# Altium PCB PCB1test route.PcbDoc
Units mm, origin at the board's own origin, x right, y up, seen from the top; angles counter-clockwise.
Board outline 70.36 x 70.1 mm, 2 copper layers (Top Layer, Bottom Layer); 21 components, 18 nets, 83 pads, 0 vias.
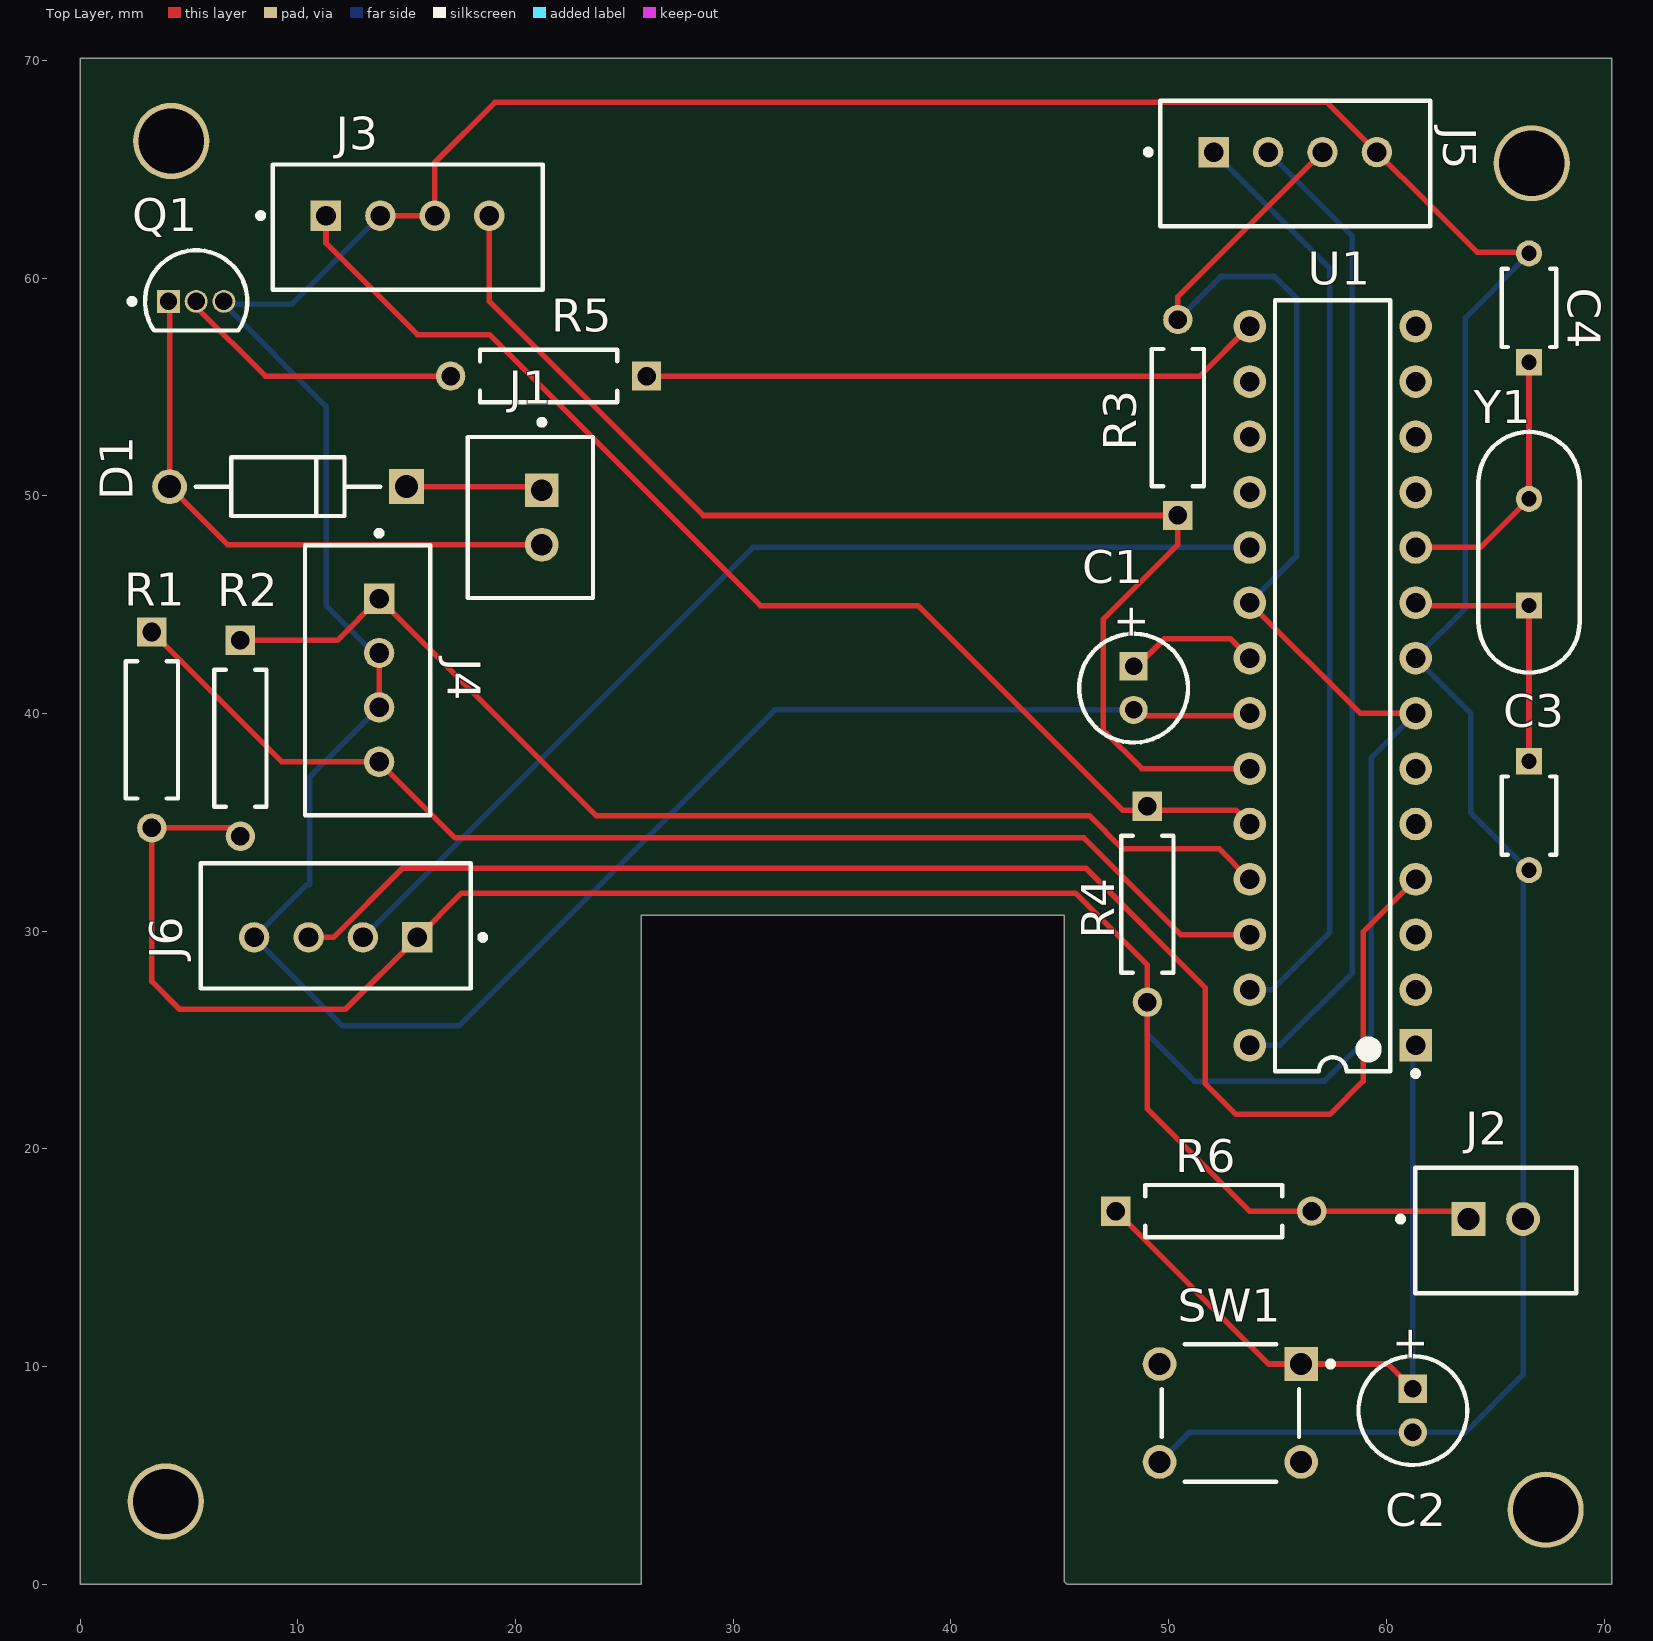
[diagram p0: Top Layer view]
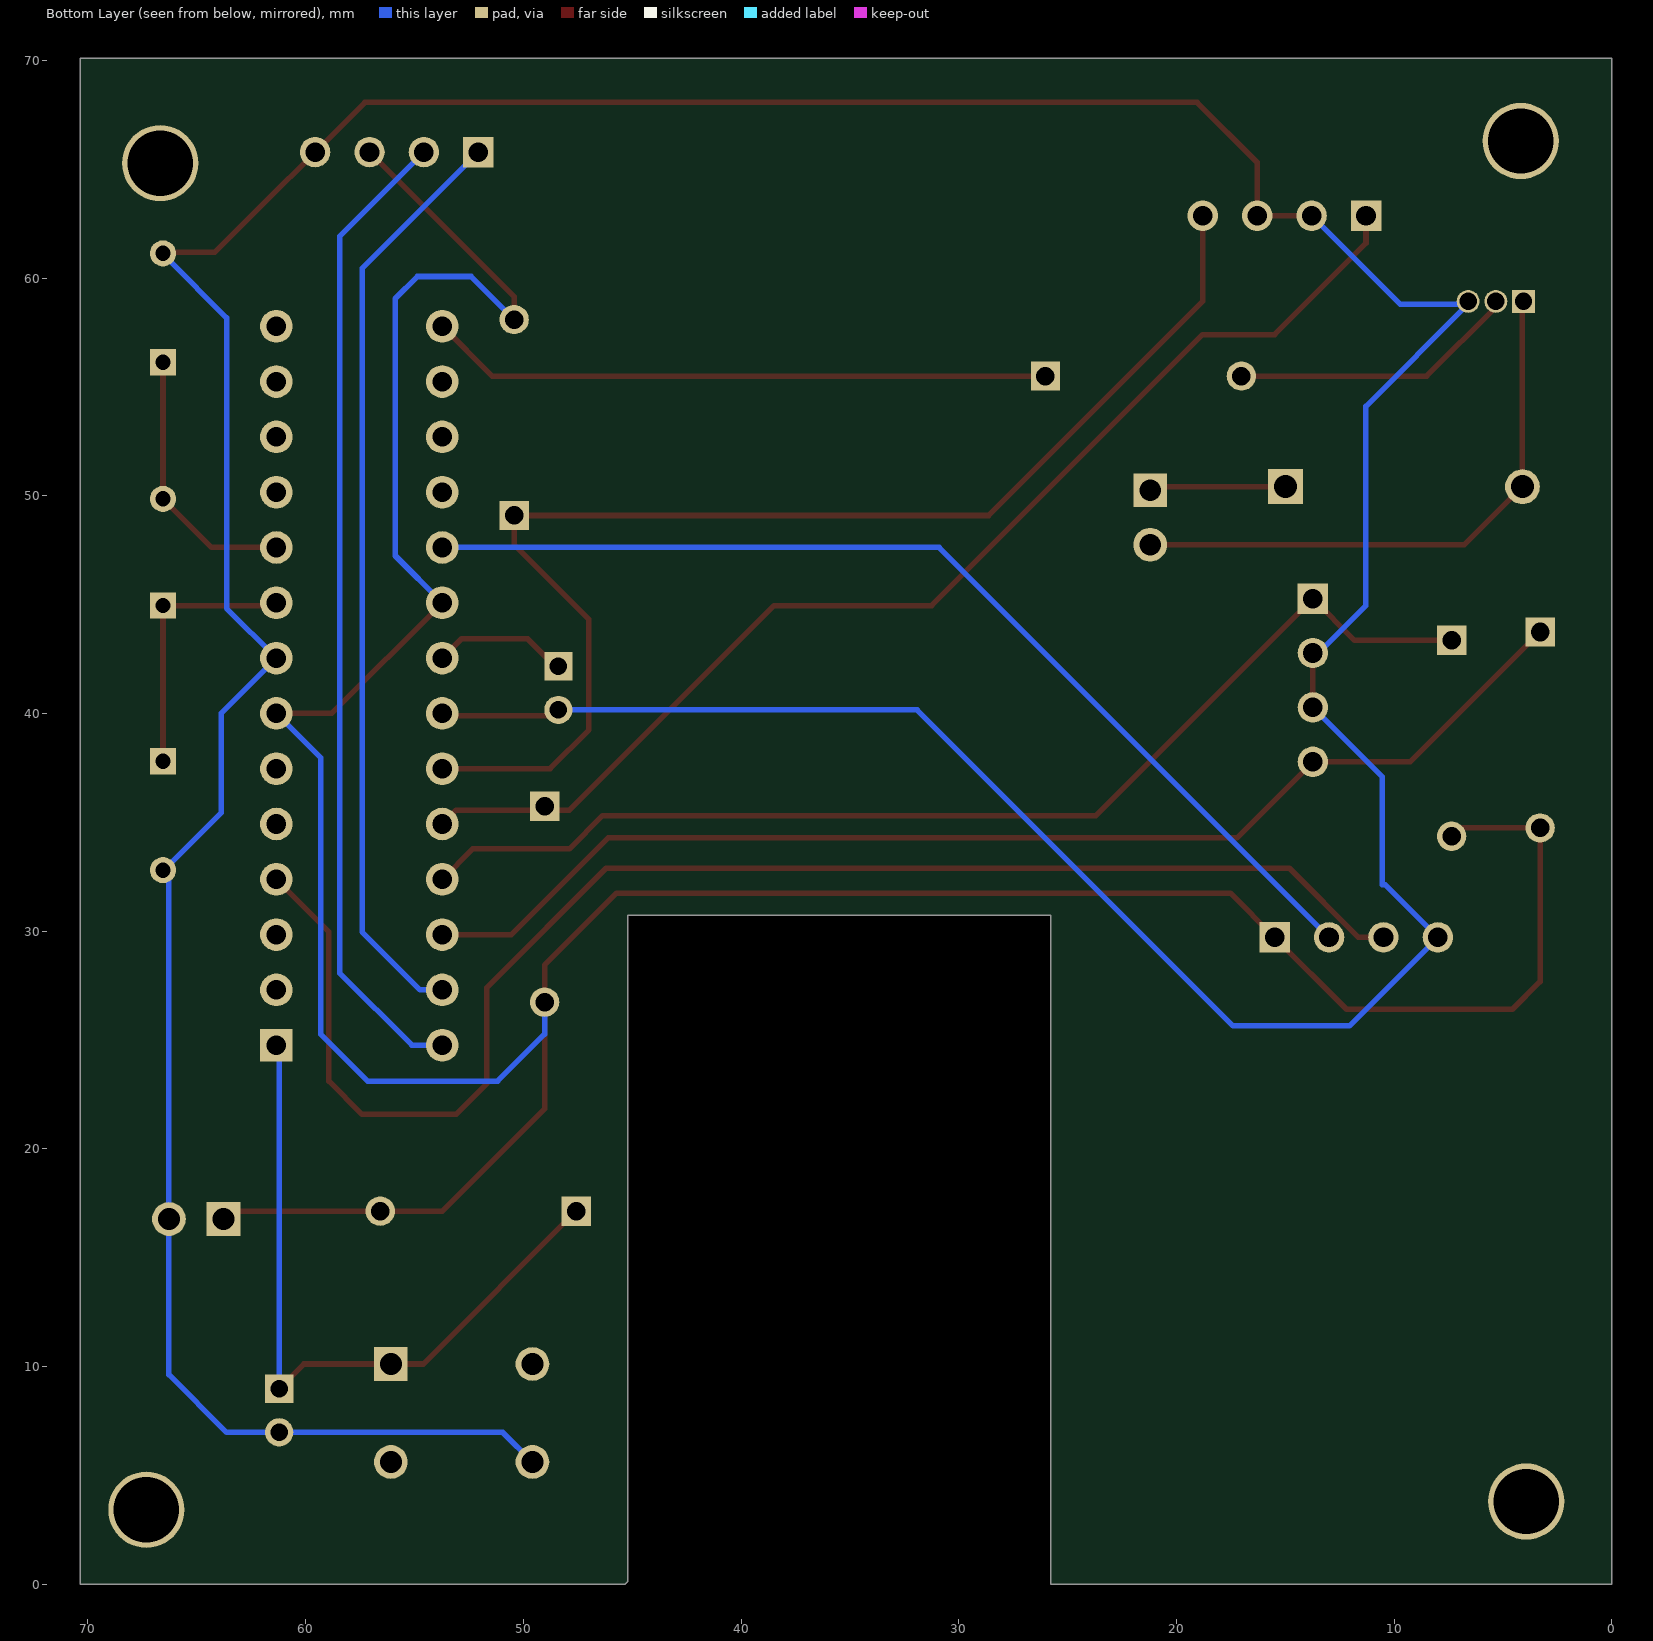
[diagram p1: Bottom Layer view, seen from below]

## Layer stack, top to bottom
Top Solder: solder mask 0.0102, Solder Resist, Dk 3.5
Top Layer: signal copper 0.0356
Dielectric 1: dielectric 0.32, FR-4, Dk 4.8
Bottom Layer: signal copper 0.0356
Bottom Solder: solder mask 0.0102, Solder Resist, Dk 3.5

## Board outline
0,0 0,70.104 70.358,70.104 70.358,0 45.339,0 45.212,0.127 45.212,30.734 25.781,30.734 25.781,0

## Design rules (kind name [scope] priority, off if disabled: settings)
BoardOutlineClearance [All] p1: gap=0.2 ignorepadtopadclearanceinfootprint=FALSE
Clearance [All] p1: gap=0.127 ignorepadtopadclearanceinfootprint=FALSE except(0.25: Arc-Hole Track-Hole SMDPad-Hole THPad-Hole Via-Hole Fill-Hole Poly-Hole Region-Hole Text-Hole)
ComponentClearance [All] p1: gap=0.127 collisioncheckmode=3 verticalgap=0.127 showdistances=TRUE
DiffPairsRouting [All] p1: maxlimit=0.254 minlimit=0.127 mostfreqgap=0.127 toplayer_minwidth=0.127 toplayer_maxwidth=25.4 toplayer_prefwidth=0.127 bottomlayer_minwidth=0.127 bottomlayer_maxwidth=25.4 bottomlayer_prefwidth=0.127 maxuncoupledlength=12.7
Height [All] p1: minheight=0 maxheight=1816.048 prefheight=12.7
HoleSize [All] p1: absolutevalues=TRUE maxlimit=6.3 minlimit=0.3 maxpercent=80.000 minpercent=20.000
HoleToHoleClearance [All] p1: gap=0.25 allowstackedmicrovias=FALSE
MinimumAnnularRing [All] p1: minimumring=0.076
MinimumSolderMaskSliver [All] p1: minsoldermaskwidth=0
PlaneClearance [All] p1: clearance=0.127
PlaneConnect PlaneConnectPowerPads [InPadClass('PowerPads')] p1: planeconnectstyle=Direct reliefexpansion=0.508 reliefentries=4 reliefconductorwidth=0.254 reliefairgap=0.254
PlaneConnect [All] p2: pad.planeconnectstyle=Relief pad.reliefexpansion=0.3 pad.reliefentries=4 pad.reliefconductorwidth=0.127 pad.reliefairgap=0.127 via.planeconnectstyle=Direct via.reliefexpansion=0.3 via.reliefentries=4 via.reliefconductorwidth=0.127 via.reliefairgap=0.127
PolygonConnect PolygonConnectPowerPads [All vs (InPadClass('PowerPads'))] p1: connectstyle=Direct reliefconductorwidth=0.254 reliefentries=4 polygonreliefangle="90 Angle" airgapwidth=0.254
PolygonConnect [All] p2: thpad.connectstyle=Relief thpad.reliefconductorwidth=0.127 thpad.reliefentries=4 thpad.polygonreliefangle="90 Angle" thpad.airgapwidth=0.127 smdpad.connectstyle=Relief smdpad.reliefconductorwidth=0.127 smdpad.reliefentries=4 smdpad.polygonreliefangle="90 Angle" smdpad.airgapwidth=0.127 via.connectstyle=Direct via.reliefconductorwidth=0.127 via.reliefentries=4 via.polygonreliefangle="90 Angle" via.airgapwidth=0.127
RoutingVias [All] p1: holewidth=0.3 width=0.6 viastyle="Through Hole" minholewidth=0.3 minwidth=0.6 maxholewidth=0.6 maxwidth=6.6
SilkToSilkClearance [All] p1: silktosilkclearance=0
SilkToSolderMaskClearance [IsPad] p1: minsilkscreentomaskgap=0.127 clearancetoexposedcopper=TRUE
SolderMaskExpansion [All] p1: expansion=0.075 istentingtop=FALSE
Width [All] p1: maxlimit=25.4 minlimit=0.254 preferedwidth=0.254 minimp=50.000000 maximp=50.000000 favimp=50.000000
20 further rules are at their usual default settings.

## Classes and differential pairs
component class Sheet1: C1 C2 C3 C4 D1 J1 J2 J3 J5 J6 R1 R2 R3 R4 R5 R6 SW1 U1 Y1

## Components (designator, comment, footprint, x,y, rotation, side; value= is the part's Value field where it differs from the comment)
C1 "ECA-1HHG010" CAPPR55-200-1100X500X1200 48.387,41.164 r270 top value=0.1µF
C2 "ECA-1HHG010" CAPPR55-200-1100X500X1200 61.214,7.985 r270 top value=0.1µF
C3 "RCE5C1H220J0M1H03A" FP-RCE0K1-MFG 66.548,35.306 r270 top
C4 "RCE5C1H220J0M1H03A" FP-RCE0K1-MFG 66.548,58.634 r90 top
D1 "1N4001-E3/54" FP-1N4001-E3-54-MFG 9.548,50.419 r180 top
J1 "" FP-B2B-XH-A_LF_SN-MFG 20.684,49.002 r270 top
J2 "" FP-B2B-XH-A_LF_SN-MFG 65.024,16.256 r0 top
J3 "B4B-XH-A(LF)(SN)" FP-B4B-XH-A_LF_SN-MFG 15.046,62.34 r180 top
J4 "B4B-XH-A(LF)(SN)" FP-B4B-XH-A_LF_SN-MFG 13.208,41.529 r90 top
J5 "B4B-XH-A(LF)(SN)" FP-B4B-XH-A_LF_SN-MFG 55.813,65.261 r180 top
J6 "B4B-XH-A(LF)(SN)" FP-B4B-XH-A_LF_SN-MFG 11.744,30.243 r0 top
Q1 "BC547B" ONSC-TO-92-3-29-11 5.334,58.928 r0 top
R1 "MFR-25FBF52-22R1" RESA60-630X240 3.302,39.243 r270 top value=4.7K
R2 "MFR-25FBF52-22R1" RESA60-630X240 7.366,38.862 r270 top value=4.7K
R3 "MFR-25FBF52-22R1" RESA60-630X240 50.419,53.594 r90 top value=4.7K
R4 "MFR-25FBF52-22R1" RESA60-630X240 49.022,31.242 r270 top value=4.7K
R5 "MFR-25FBF52-221R" RESA60-630X240 21.518,55.499 r180 top value=221
R6 "MFR-25FBF52-22R1" RESA60-630X240 52.07,17.145 r0 top value=10K
SW1 "EVQ-PAG07K" FP-EVQ-PAG07K-MFG 52.832,7.874 r270 top
U1 "ATmega328-PU" 28P3 57.531,41.275 r180 top
Y1 "HC-49US 16.000MHZ" JPY-HC-49US 66.548,47.408 r90 top

## Footprints (in the part's own frame and the unit in brackets; to place one, negate y for a bottom-side part, rotate by r counter-clockwise, add the part's x,y. Pads: shape width x height; smd on the part's side, far side on the other; paste and mask are expansions set on the pad)
28P3 [mm] "28-Pin Plastic Dual In-Line Package (PDIP)"
  rect 1.5x1.5 hole 0.9: 1(-3.81,16.51)
  round 1.5 hole 0.9: 2(-3.81,13.97) 3(-3.81,11.43) 4(-3.81,8.89) 5(-3.81,6.35) 6(-3.81,3.81) 7(-3.81,1.27) 8(-3.81,-1.27) 9(-3.81,-3.81) 10(-3.81,-6.35) 11(-3.81,-8.89) 12(-3.81,-11.43) 13(-3.81,-13.97) 14(-3.81,-16.51) 15(3.81,-16.51) 16(3.81,-13.97) 17(3.81,-11.43) 18(3.81,-8.89) 19(3.81,-6.35) 20(3.81,-3.81) 21(3.81,-1.27) 22(3.81,1.27) 23(3.81,3.81) 24(3.81,6.35) 25(3.81,8.89) 26(3.81,11.43) 27(3.81,13.97) 28(3.81,16.51)
  silkscreen extent -3.94,-17.7 2.65,17.93, body extent -3.6,-17.65 3.6,17.65, height 4.58
CAPPR55-200-1100X500X1200 [mm] "THD, 2-Leads, Dia 5mm, Pin Spacing 2mm"
  rect 1.3x1.3 hole 0.8: 1(-1,0)
  round 1.3 hole 0.8: 2(1,0)
  silkscreen extent -2.5,-2.5 2.5,2.5, body extent -2.5,-2.5 2.45,2.5, height 12
FP-1N4001-E3-54-MFG [mm]
  rect 1.6x1.6 hole 1.05 paste-1000 mask+0: 1(-5.438,0)
  round 1.6 hole 1.05 paste-1000 mask+0: 2(5.438,0)
  silkscreen extent -4.24,-1.35 4.24,1.35, body extent -6.34,-1.45 6.34,1.45, height 0.25
FP-B2B-XH-A_LF_SN-MFG [mm]
  rect 1.55x1.55 hole 1 paste-1000 mask+0: 1(-1.25,0.525)
  round 1.55 hole 1 paste-1000 mask+0: 2(1.25,0.525)
  silkscreen extent -4.5,-2.87 3.7,2.88, body extent -3.8,-2.98 3.8,2.98, height 0.25
FP-B4B-XH-A_LF_SN-MFG [mm]
  rect 1.4x1.4 hole 0.9 paste-1000 mask+0: 1(3.75,-0.525)
  round 1.4 hole 0.9 paste-1000 mask+0: 2(1.25,-0.525) 3(-1.25,-0.525) 4(-3.75,-0.525)
  silkscreen extent -6.2,-2.88 6.87,2.87, body extent -6.3,-2.98 6.3,2.98, height 0.25
FP-EVQ-PAG07K-MFG [mm]
  rect 1.55x1.55 hole 1 paste-1000 mask+0: A(-2.25,3.25)
  round 1.55 hole 1 paste-1000 mask+0: A'(-2.25,-3.25) B(2.25,3.25) B'(2.25,-3.25)
  silkscreen extent -3.15,-3.15 3.15,4.73, body extent -3.25,-4.13 3.25,4.13, height 0.25
FP-RCE0K1-MFG [mm]
  rect 1.2x1.2 hole 0.7 paste-1000 mask+0: 1(-2.5,0)
  round 1.2 hole 0.7 paste-1000 mask+0: 2(2.5,0)
  silkscreen extent -1.8,-1.25 1.8,1.25, body extent -3.2,-1.35 3.2,1.35, height 0.25
JPY-HC-49US [mm] "THD, 2-Leads, Body 11.05x4.65mm, Pitch 4.9mm"
  rect 1.2x1.2 hole 0.7: 1(-2.45,0)
  round 1.2 hole 0.7: 2(2.45,0)
  silkscreen extent -5.53,-2.33 5.53,2.33, body extent -5.53,-2.33 5.52,2.32, height 3.5
ONSC-TO-92-3-29-11 [mm] "TO, 3-Leads, Body Dia 4.7mm, Pitch 1.27mm"
  rect 1.05x1.05 hole 0.8: 1(-1.27,0)
  round 1.05 hole 0.8: 2(0,0) 3(1.27,0)
  silkscreen extent -3.07,-1.34 2.35,2.35, body extent -2.35,-1.33 2.36,2.36, height 7.87
RESA60-630X240 [mm] "Axial Resistor, 2-Leads, Dia 2.4mm, Body Length 6.3mm"
  rect 1.35x1.35 hole 0.85: 1(-4.5,0)
  round 1.35 hole 0.85: 2(4.5,0)
  silkscreen extent -3.15,-1.2 3.15,1.2, body extent -4.77,-1.19 4.77,1.2, height 2.4

## Part data
C1 C2: library part CMP-001-00024-7, "Aluminum Electrolytic Capacitor, 1 uF, +/- 20%, 50 V, -55 to 105 degC, 2-Pin THD, RoHS, Bulk", Capacitor Type=Electrolytic, Case/Package=Radial, Manufacturer=Panasonic, Max Operating Temperature=105°C, Min Operating Temperature=-55°C, Package Description="2-Pin Radial Lead, Dia 5 mm, Height 12 mm", Package Quantity=200, Package Reference=CAPPR55-200-1100X500X1200, Ripple Current=10mA, Tolerance=20%, Voltage Rating=50V, Datasheet URL=https://datasheet.ciiva.com/7275/94060-7275472.pdf, Datasheet Version=Mar-05, Diameter=5mm, Lead Pitch=2mm, Manufacturer URL=http://www.panasonic.com/, Mounting Technology=TH, Packaging=Bulk, Pins=2, Ripple Current (AC)=10mA, RoHS Compliant=True
C3 C4: library part CMP-06035-004895-1, "Cap Ceramic 22pF 50V C0G ±5% Radial 5mm +125°C Automotive Bulk", Capacitance=22pF, Case/Package=Radial, Dielectric=C0G, Max Operating Temperature=125°C, Min Operating Temperature=-55°C, Package Quantity=2000, Ratings=AEC-Q200, Resistor Type=Ceramic, Tolerance=5%, Voltage Rating=50V, Height=3.5mm, Height - Seated (Max)=0.138inch, Lead Diameter=0.5mm, Lead Pitch=0.197inch, Lead/Base Style="Formed Leads", Length=0.142inch, Mount="Through Hole", Packaging="Tape and Reel", Termination=Radial, Voltage Rating (DC)=50V, Width=0.098inch
D1: library part CMP-02540-000077-1, "DIODE GEN PURP 50V 1A DO204AL", Average Rectified Current=1A, Capacitance=15pF, Case/Package=DO-204AL, Forward Voltage=1.1V, Max Forward Surge Current (Ifsm)=30A, Max Operating Temperature=150°C, Max Repetitive Reverse Voltage (Vrrm)=50V, Max Reverse Current=5uA, Min Operating Temperature=-50°C, Package Quantity=5500, Peak Non-Repetitive Surge Current=45A, Current=1A, Current Rating=1A, Diameter=2.7mm, Element Configuration=Single, Forward Current=1A, Height=2.7mm, Lead Free="Lead Free", Length=0.204inch, Max Reverse Voltage (DC)=50V, Max Surge Current=30A, Mount="Through Hole", Number of Pins=2, Output Current=1A, Packaging="Tape and Reel", Polarity=Standard, Radiation Hardening=No, Reverse Voltage=50V, RoHS Compliant=Yes, Series=-, Voltage=50V, Voltage Rating (DC)=50V, Width=2.7mm
J1 J2: library part CMP-2000-05888-3, "CONN HEADER VERT 2POS 2.5MM", Color=Natural, Contact Resistance=20mR, Current Rating=3A, Housing Color=White, Insulation Resistance=1GR, Max Operating Temperature=85°C, Max Voltage Rating (AC)=250V, Min Operating Temperature=-25°C, Connector Type="Male Pin", Contact Material=Brass, Contact Plating=Tin, Contact Type="Male Pin", Depth=5.75mm, Fastening Type=Detent, Housing Material=Polyamide, Lead Free="Lead Free", Lead Pitch=2.5mm, Length=7.4mm, Max Current Rating=3A, Max Voltage Rating (DC)=250V, Mount="Through Hole", Number of Contacts=2, Number of Positions=2, Number of Rows=1, Orientation=Straight, Packaging=Bulk, Pitch=2.5mm, REACH SVHC="No SVHC", Series=XH, Termination=Solder, Voltage Rating=250V, Voltage Rating (AC)=250V, Wire/Cable Gauge=22AWG
J3 J4 J5 J6: library part CMP-17439-000250-1, "CONN HEADER VERT 4POS 2.5MM", Color=Natural, Contact Resistance=20mR, Current Rating=3A, Flammability Rating="UL94 V-0", Housing Color=White, Insulation Resistance=1GR, Max Operating Temperature=85°C, Max Voltage Rating (AC)=250V, Min Operating Temperature=-25°C, Package Quantity=500, Connector Type=Header, Contact Finish - Mating=TIN, Contact Material=Brass, Contact Plating=Tin, Contact Shape=Square, Contact Type="Male Pin", Depth=5.75mm, Fastening Type=Detent, Gender=Male, Housing Material=Polyamide, Insulation Color=Natural, Insulation Material=Nylon, Lead Free="Lead Free", Lead Pitch=2.5mm, Length=12.4mm, Mated Stacking Heights=9.8mm, Material=Polyamide, Max Current Rating=3A, Max Voltage Rating (DC)=250V, Mount="Through Hole", Number of Contacts=4, Number of Positions=4, Number of Rows=1, Orientation=Straight, Packaging=Bulk, Pitch=2.5mm, REACH SVHC="No SVHC", Series=XH, Termination=Solder, Voltage Rating=250V, Voltage Rating (AC)=250V, Wire/Cable Gauge=22AWG
Q1: library part CMP-1048-01467-1, "Amplifier Transistor, NPN Silicon, 3-Pin TO-92, Bulk Box", Manufacturer="On Semiconductor", ComponentLink1Description="Manufacturer URL", ComponentLink1URL=http://www.onsemi.com/, ComponentLink2Description=Datasheet, ComponentLink2URL=http://www.onsemi.com/pub_link/Collateral/BC546-D.PDF, ComponentLink3Description="Package Specification", ComponentLink3URL=http://www.onsemi.cn/pub_link/Collateral/2N6426-D.PDF, DatasheetVersion="Rev. 7", fT Min (MHz)=150, IC Continuous (A)=0.1, Mounting Technology="Through Hole", PackageDescription="3-Pin Transistor Outline, Body 4.825 x 3.685 mm, Pitch 1.27 mm", PackageReference=TO-92-3-29-11_AM_SL, PackageVersion="Rev. AM", Packing="Bulk Box", PartNumber=BC547B, Polarity=NPN, RoHS=FALSE
R1 R2 R3 R4 R6: library part CMP-009-00053-4, "Axial Resistor, 22.1 Ohm, +/- 1%, 250 mW, -55 to 155 degC, 2-Pin THD, RoHS, Bulk", Case/Package=Axial, Manufacturer=Yageo, Max Operating Temperature=155°C, Min Operating Temperature=-55°C, Package Description="2-Pin Axial Lead, Dia 2.4 mm, Body Length 6.3 mm", Package Quantity=200, Package Reference=MFR-25, Power=250mW, Tolerance=1%, Voltage Rating=250V, Datasheet URL=http://www.yageo.com/documents/recent/Yageo%20LR_MFR_2013.pdf, Datasheet Version=Apr-13, Manufacturer URL=http://www.yageo.com/, Mounting Technology=TH, Packaging=Bulk, RoHS Compliant=True
R5: library part CMP-009-00051-4, "Axial Resistor, 221 Ohm, +/- 1%, 250 mW, -55 to 155 degC, 2-Pin THD, RoHS, Bulk", Case/Package=Axial, Manufacturer=Yageo, Max Operating Temperature=155°C, Min Operating Temperature=-55°C, Package Description="2-Pin Axial Lead, Dia 2.4 mm, Body Length 6.3 mm", Package Quantity=200, Package Reference=MFR-25, Power=250mW, Tolerance=1%, Voltage Rating=250V, Datasheet URL=http://www.yageo.com/documents/recent/Yageo%20LR_MFR_2013.pdf, Datasheet Version=Apr-13, Manufacturer URL=http://www.yageo.com/, Mounting Technology=TH, Packaging=Bulk, RoHS Compliant=True
SW1: library part CMP-05618-000034-1, "SWITCH TACTILE SPST-NO 0.02A 15V", Actuator Color=Black, Contact Current Rating=20mA, Contact Resistance=50mR, Max Operating Temperature=70°C, Max Voltage Rating (DC)=15V, Min Operating Temperature=-20°C, Operating Force=2.6N, Package Quantity=500, Actuator Length=3.1mm, Actuator Type=Standard, Current Rating=20mA, Depth=7.8mm, Electrical Life=50000Cycles, Illumination Type=Non-Illuminated, Lead Free="Lead Free", Length=6mm, Max Current Rating=20mA, Mechanical Life=50000Cycles, Mount="Through Hole", Orientation=Straight, Packaging=Bulk, Radiation Hardening=No, RoHS Compliant=Yes, Series=EVQPA, Size=6mm, Switch Function=Off-Mom, Switch Travel=0.25mm, Termination="PC Pin", Throw Configuration=SPST, Voltage Rating (DC)=15V
U1: library part CMP-0095-00015-2, "8-bit AVR Microcontroller, 32KB Flash, 1KB EEPROM, 2KB SRAM, 28-pin PDIP, Industrial Grade (-40°C to 85°C)", ComponentLink1Description="Manufacturer URL", ComponentLink1URL=http://www.atmel.com/, ComponentLink2Description="ATmega48A/48PA/88A/88PA/168A/168PA/328/328P Datasheet", ComponentLink2URL=http://www.atmel.com/dyn/resources/prod_documents/8271.pdf, ComponentLink3Description="ATmega48A/48PA/88A/88PA/168A/168PA/328/328P Summary", ComponentLink3URL=http://www.atmel.com/dyn/resources/prod_documents/8271S.pdf, DatasheetVersion="revD, May-2011", PackageDescription="28-lead (0.300\"/7.62mm Wide) Plastic Dual Inline Package (PDIP)", PackageReference=28P3, PackageVersion="revB, Sep-2001", RevisionNote="DatasheetVersion updated. URLs added."
Y1: library part CMP-003-00005-2, "Crystal, 16 MHz, +/- 30 ppm, 18 pF, -20 to 70 degC, 2-Pin THD", Case/Package=HC-49US, Frequency=16MHz, Manufacturer="Jing peng yuan", Package Description="2-Pin Throug Hole Device, Body 11.05 x 4.65 mm, Pitch 4.9 mm", Datasheet URL=https://statics3.seeedstudio.com/images/opl/datasheet/306010014.pdf, Datasheet Version=May-15, Mounting Technology=TH, Package Reference=HC-49US, RoHS Compliant=Unknown

## Free pads (board coordinates)
  round 3.5 hole 3: 1(4.191,66.294) 2(3.937,3.81) 2(66.675,65.278) 3(67.31,3.429)

## Nets (pads, with @x,y where several pads share a name; then routed paths per layer and width w, separated by ;. In a path a pad name is that pad's centre, name@x,y a point inside that pad or via, vN(x,y) a via of type N, cw(c..) or ccw(c..) an arc to the next point about the centre after c; other vN are vias at no path point)
+5: J2.1 J5.3 J6.1 R1.2 R2.2 R3.2 R4.2 R6.2 U1.7 U1.20 | length 155.1
  Top Layer w0.254: R2.2 6.985,34.743 R1.2 3.302,27.686 4.572,26.416 12.192,26.416 J6.1 17.526,31.75 45.72,31.75 49.022,28.448 R4.2 49.022,21.844 53.721,17.145 R6.2 ; R3.2 50.419,59.142 J5.3 ; U1.20 58.801,40.005 U1.7 ; R6.2@56.896,17.145 63.41,17.145 J2.1
  Bottom Layer w0.254: R4.2 49.022,25.273 51.181,23.114 57.15,23.114 59.309,25.273 59.309,37.973 U1.7 ; R3.2 52.396,60.071 54.864,60.071 55.88,59.055 55.88,47.244 U1.20
GND: C1.2 C2.2 C3.2 C4.2 J2.2 J3.2 J3.3 J4.2 J4.3 J5.4 J6.4 Q1.3 SW1.B' U1.8 U1.22 | length 230.2
  Top Layer w0.254: J4.3 J4.2 ; J3.2 J3.3 16.296,65.318 19.05,68.072 57.277,68.072 64.175,61.174 65.913,61.174 ; C1.2@48.002,40.549 C1.2 ; C1.2@48.26,39.894 53.61,39.894 U1.22
  Bottom Layer w0.254: J4.3 10.541,37.087 10.541,32.131 10.407,32.131 J6.4 12.058,25.654 17.399,25.654 31.909,40.164 C1.2 ; J4.2 13.482,42.779 11.303,44.958 11.303,54.102 6.604,58.801 9.732,58.801 J3.2 ; SW1.B' 50.943,6.985 C2.2 63.627,6.985 66.274,9.632 J2.2 66.274,32.532 C3.2 66.508,32.806 63.881,35.433 63.881,40.005 U1.8 63.627,44.831 63.627,58.166 C4.2@66.351,60.89
NetC1_1: C1.1 U1.21 | length 6.5
  Top Layer w0.254: C1.1@48.26,41.894 49.8,43.434 52.832,43.434 U1.21
NetC2_1: C2.1 R6.1 SW1.A U1.1 | length 32.9
  Top Layer w0.254: R6.1 54.591,10.124 SW1.A 60.075,10.124 C2.1
  Bottom Layer w0.254: C2.1 61.214,24.638 U1.1
NetC3_1: C3.1 U1.9 Y1.1 | length 12.4
  Top Layer w0.254: U1.9 61.468,44.958 Y1.1 C3.1
NetC4_1: C4.1 U1.10 Y1.2 | length 12.4
  Top Layer w0.254: U1.10 64.315,47.625 Y1.2 C4.1
NetD1_1: D1.1 J1.1 | length 6.3
  Top Layer w0.254: D1.1 21.042,50.419 J1.1
NetD1_2: D1.2 J1.2 Q1.1 | length 26.7
  Top Layer w0.254: Q1.1 4.11,58.882 D1.2 6.777,47.752 J1.2
NetJ3_1: J3.1 R4.1 U1.24 | length 54.7
  Top Layer w0.254: J3.1 11.296,61.602 15.494,57.404 18.796,57.404 31.242,44.958 38.481,44.958 47.879,35.56 49.149,35.56 49.276,35.56 50.038,35.56 53.086,35.56 U1.24
NetJ3_4: J3.4 R3.1 U1.23 | length 58.4
  Top Layer w0.254: J3.4 18.796,58.928 28.63,49.094 R3.1 50.419,47.752 46.99,44.323 46.99,39.243 48.768,37.465 U1.23
NetJ4_1: J4.1 R2.1 U1.25 | length 52.5
  Top Layer w0.254: R2.1 11.816,43.362 J4.1 23.706,35.306 46.355,35.306 47.879,33.782 52.324,33.782 U1.25
NetJ4_4: J4.4 R1.1 U1.26 | length 56.2
  Top Layer w0.254: R1.1 9.266,37.779 J4.4 17.222,34.29 46.101,34.29 50.546,29.845 U1.26
NetJ5_1: J5.1 U1.27 | length 42.8
  Bottom Layer w0.254: J5.1 57.404,60.445 57.404,29.972 54.737,27.305 U1.27
NetJ5_2: J5.2 U1.28 | length 45.6
  Top Layer w0.254: J5.2@54.563,65.579 J5.2
  Bottom Layer w0.254: U1.28 55.118,24.765 58.42,28.067 58.42,61.929 J5.2
NetJ6_2: J6.2 U1.19 | length 48.1
  Bottom Layer w0.254: J6.2 30.901,47.625 U1.19
NetJ6_3: J6.3 U1.4 | length 67.9
  Top Layer w0.254: J6.3 11.645,29.718 14.82,32.893 46.197,32.893 51.689,27.401 51.689,22.987 53.086,21.59 57.404,21.59 58.928,23.114 58.928,29.972 U1.4
NetQ1_2: Q1.2 R5.2 | length 13.3
  Top Layer w0.254: Q1.2 5.334,58.674 8.509,55.499 R5.2
NetR5_1: R5.1 U1.15 | length 28.6
  Top Layer w0.254: R5.1 51.435,55.499 U1.15
pads on no net: SW1.A' SW1.B U1.2 U1.3 U1.5 U1.6 U1.11 U1.12 U1.13 U1.14 U1.16 U1.17 U1.18

## Silkscreen, mask and mechanical layers (free items; w line width, h text height)
Board:
  lines w0.254: 0.127,0.127 0.127,70.104 70.358,70.104 70.358,0 45.085,0 45.085,30.734 25.781,30.734 25.654,30.734 25.654,0 0.254,0 0.127,0.127

## Dimensions
3.937,3.81 to 0.127,0.127 on Board
3.937,3.81 to 0.254,0 on Board
67.31,3.429 to 70.358,0 on Board
67.31,3.429 to 70.358,0 on Board
66.675,65.278 to 70.358,70.104 on Board
66.675,65.278 to 70.358,70.104 on Board

## Text inside footprints (layer, text, board x,y; h text height)
C1: Top Overlay "+" at 47.65,45.072 h1.5 r270
C2: Top Overlay "+" at 60.477,11.893 h1.5 r270